# EAGLE board AIRDC (EAGLE 9.5.1)
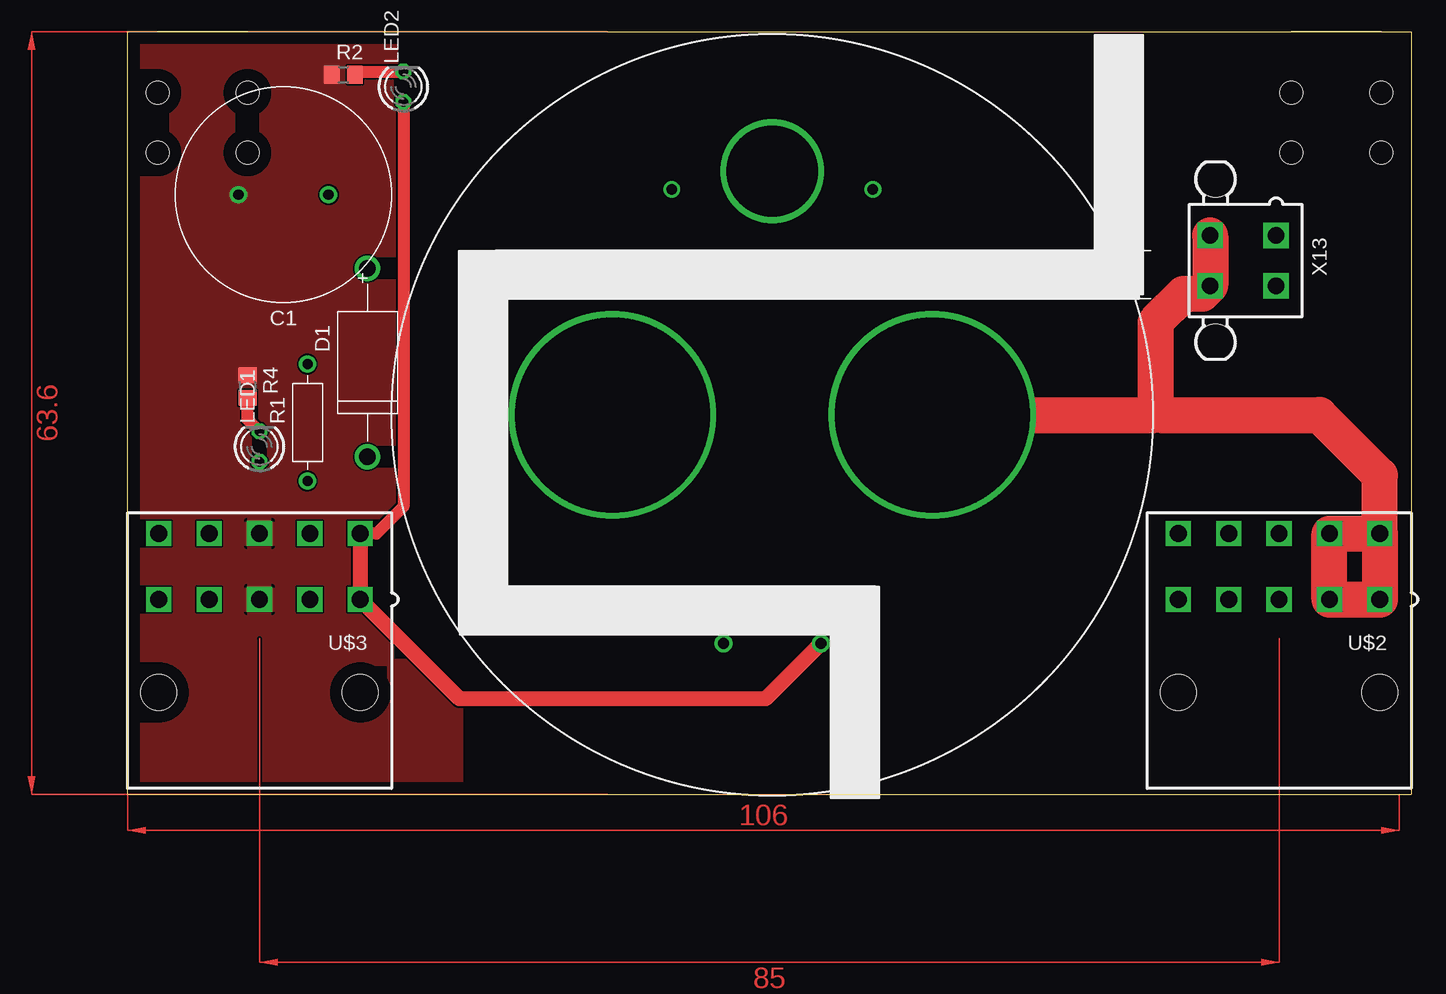
[diagram p0: board, top side]
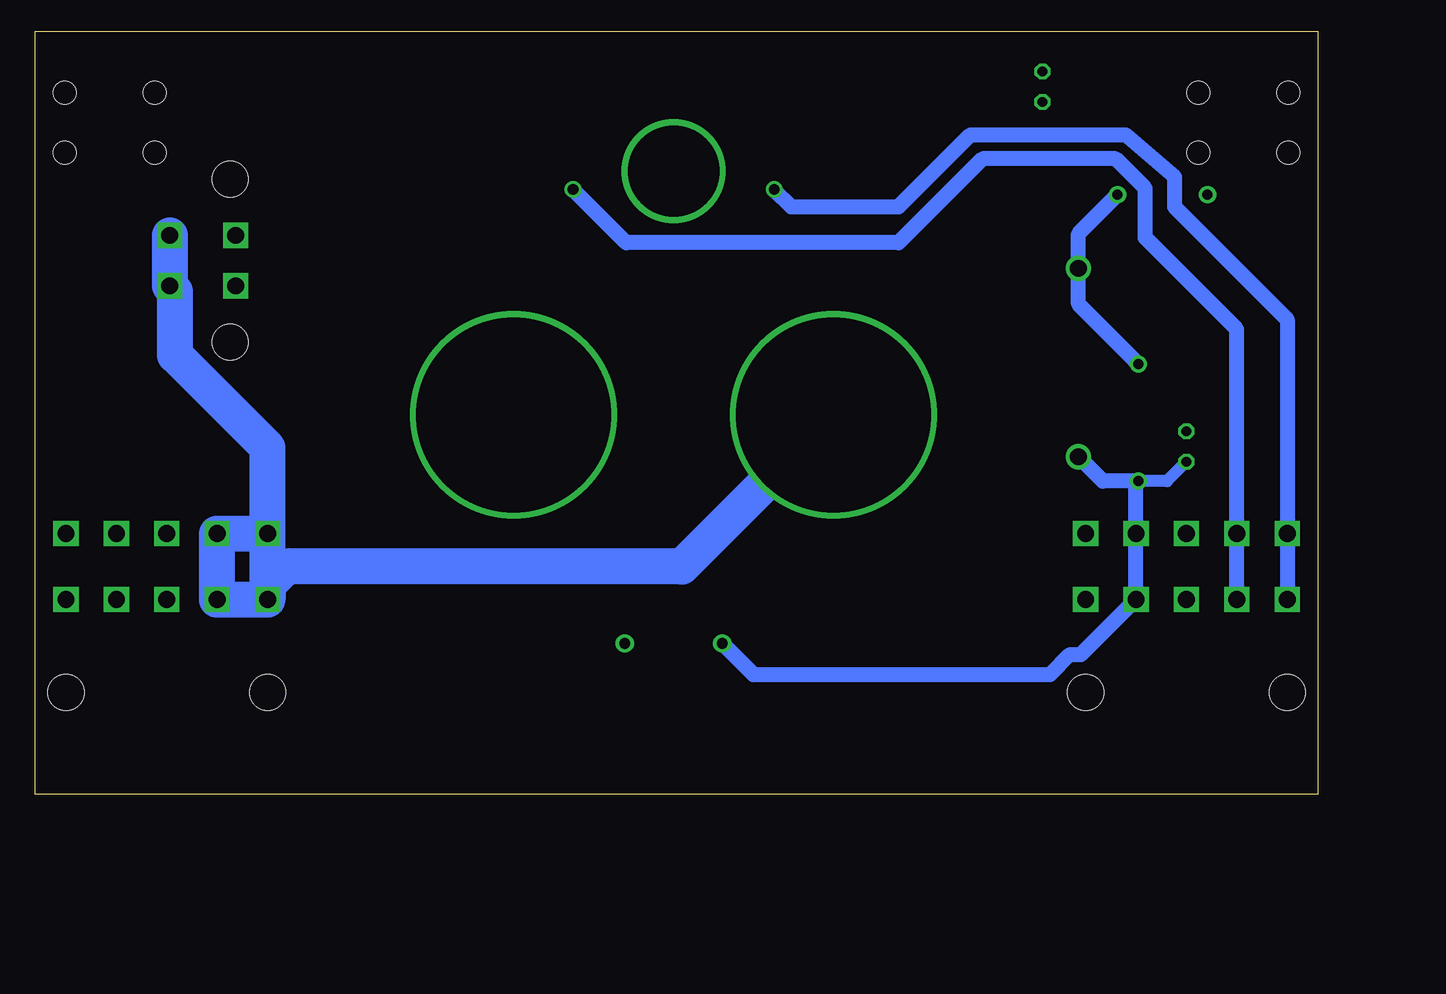
[diagram p1: board, bottom side, seen from below]

Size 107 x 63.6 mm. Coordinates in mm from the lower left corner, seen from the top.
Outline: 0,0 107,0 107,63.6 0,63.6 0,0
Copper layers (1*16): Top 0.035mm / dielectric 1.5mm / Bottom 0.035mm
Design rules "default": minimum track width 6mil, minimum drill 0.35mm, track to track 6mil, track to pad 6mil, pad to pad 6mil, via to via 6mil, smd to smd 6mil, copper to edge 40mil, drill to drill 6mil, minimum pad ring 10mil, minimum via ring 8mil, stop-mask expansion 4mil, vias tented up to drill 0mil, thermal gap 10mil
Net classes: 0 default: width 1 mm, clearance 0.152 mm; 1 LV: clearance 0.001 mm; 2 HV: clearance 2.5 mm

## Footprints (pad centres in the part's own frame; a part is rotated, then mirrored left to right if it is on the bottom)
CAPPRD750W65D1800H3700B = drill 0.85 pad 1.45: 1 -3.75,0; 2 3.75,0
DIOAD1570W120L850D500B = drill 1.4 pad 2.1: 1 -7.85,0; 2 7.85,0
LED3MM = drill 0.813 octagon: A -1.27,0; K 1.27,0
RESAD976W63L650D250B = drill 0.83 pad 1.43: 1 -4.88,0; 2 4.88,0
R0805 = smd 1.3 x 1.5: 1 -0.95,0; 2 0.95,0
GV224 = drill 16.256: A1 -13.335,19.05; A2 13.335,19.05 | drill 7.62: NC1 0,39.37 | drill 0.889: T1 -8.382,37.846; T2 8.382,37.846 | drill 0.889 pad 1.524: X1 -4.064,0; X2 4.064,0
15-24-6100 = drill 1.4 square: 1 8.4,-2.75; 2 4.2,-2.75; 3 0,-2.75; 4 -4.2,-2.75; 5 -8.4,-2.75; 6 8.4,2.75; 7 4.2,2.75; 8 0,2.75; 9 -4.2,2.75; 10 -8.4,2.75 | hole 3: 8.4,-10.5; -8.4,-10.5
7792 = hole 1.9: 0,5; 0,0; 7.5,0; 7.5,5
5566-4 = drill 1.4 square: 1 2.1,-2.75; 2 -2.1,-2.75; 3 2.1,2.75; 4 -2.1,2.75 | hole 3: 6.8,2.29; -6.8,2.29

## Placement (x,y rotation side)
C1  15000u  [CAPPRD750W65D1800H3700B]  13,50 180 top
D1  10A  [DIOAD1570W120L850D500B]  20,36 90 top
LED1  [LED3MM]  11,29 90 top
LED2  [LED3MM]  23,59 90 top
R1  100  [RESAD976W63L650D250B]  15,31 90 top
R2  [R0805]  18,60 0 top
R4  [R0805]  10,34 270 top
U$1  GV224  [GV224]  53.75,12.59 0 top
U$2  15-24-6100  [15-24-6100]  96,19 0 top
U$3  15-24-6100  [15-24-6100]  11,19 0 top
U$4  7792  [7792]  2.5,53.5 0 top
U$5  7792  [7792]  97,53.5 0 top
X13  5566-4  [5566-4]  93,44.5 90 top

## Library data of the parts
C1 D1 R1 = Main
LED1 LED2 U$1-U$5 = ACC-MB-R0
R2 R4 = ACC-MB-R0; SPICEPREFIX: R
X13 = ACC-MB-R0; MF: MOLEX; OC_FARNELL: unknown; OC_NEWARK: unknown

## Nets
AUX_A1 [HV]: U$1.A1 U$2.4 U$2.5 U$2.9 U$2.10 X13.1 X13.2
AUX_A2 [HV]: U$1.A2 U$2.1 U$2.2 U$2.6 U$2.7 X13.3 X13.4
AUX_T1: U$1.T1 U$3.5 U$3.10
AUX_T2: U$1.T2 U$3.4 U$3.9
COIL_X1: D1.1 LED1.A R1.1 U$1.X1 U$3.2 U$3.7
COIL_X2: LED2.A U$1.X2 U$3.1 U$3.6
GND: C1.2 R2.1 R4.1 U$3.3 U$3.8
N$1: LED2.K R2.2
N$3: C1.1 D1.2 R1.2
N$5: LED1.K R4.2

## Tracks (layer width: path | path; a pad name or v marks a point on that pad's centre or on a via)
AUX_A1
  Bottom 3: U$1.A1 53.05,19 86,19 87.6,17.4 U$2.5 | U$2.5 U$2.10 | 90.95,21.75 U$2.10 | U$2.10 U$2.9 U$2.4 U$2.5 | X13.1 X13.2 95.3,41.95 95.3,36.61 87.6,28.91 U$2.10
AUX_A2
  Top 3: U$1.A2 85.69,31.64 85.69,39.36 88.05,41.72 89.57,41.72 X13.4 X13.3 | 86,31.64 99.36,31.64 104.4,26.6 U$2.6 | U$2.6 U$2.1 U$2.2 U$2.7 U$2.6
AUX_T1
  Bottom 1.27: U$1.T1 43.93,49 35,49 29,55 16.08,55 12,51.5 12,49 2.6,39.6 U$3.10 U$3.5
AUX_T2
  Bottom 1.27: U$3.4 U$3.9 6.8,38.79 14.42,46.41 14.42,50.53 16.89,53 28,53 35,46 57.7,46 U$1.T2
COIL_X1
  Bottom 1: LED1.A 12.61,26.12 R1.1
  Bottom 1.27: U$1.X1 47.1,10 22.36,10 20.7,11.65 19.8,11.65 U$3.2 U$3.7 15.2,25.92 R1.1 17.97,26.12 D1.1
COIL_X2
  Top 1: LED2.A 23,24 20.75,21.75 U$3.6
  Top 1.27: U$3.6 U$3.1 27.65,8 53.22,8 U$1.X2
GND
  pour Top: 0,63.6 0,0 27,0 27,63.6
N$1
  Top 1: R2.2 19.22,60.27 LED2.K
N$3
  Bottom 1.27: R1.2 20,40.88 D1.2 20,46.75 C1.1
N$5
  Top 1: LED1.K 10,31.27 R4.2
(copper drawn outside any net)
  shapes: Top area x3